# EAGLE board Warmie Helper Board V.9.2 (EAGLE 6.4)
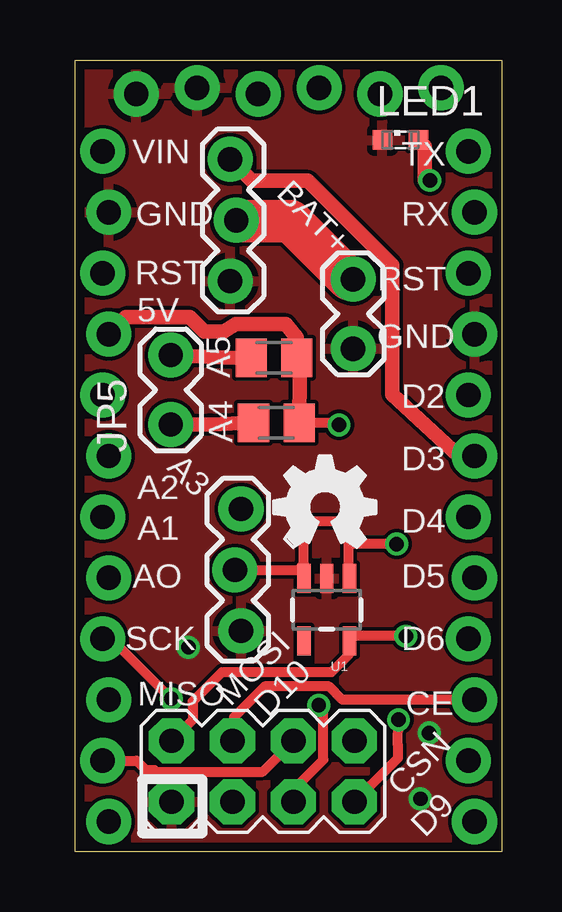
[diagram p0: board, top side]
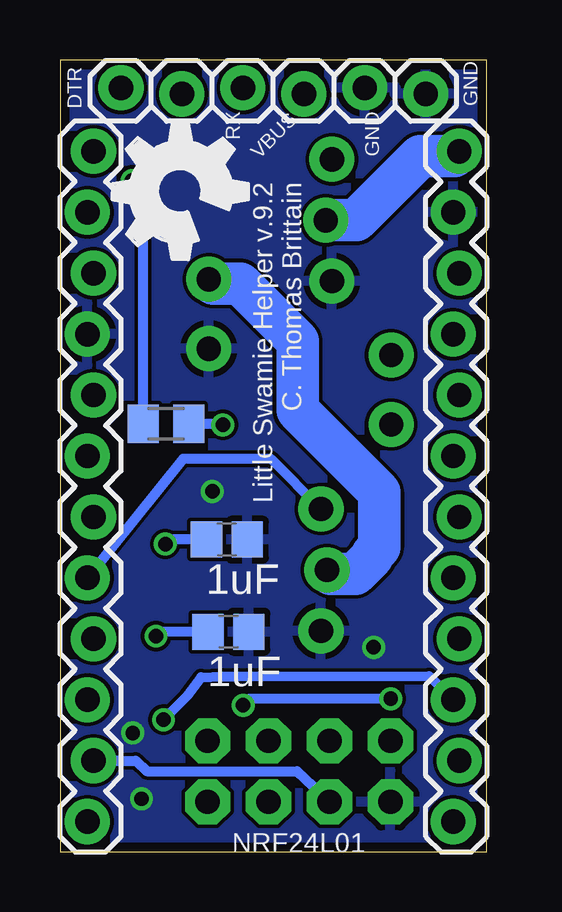
[diagram p1: board, bottom side, seen from below]

Size 17.78 x 33.02 mm. Coordinates in mm from the lower left corner, seen from the top.
Outline: 17.78,0 0,0 0,33.02 17.78,33.02 17.78,0
Copper layers (1*16): Top 0.0356mm / dielectric 1.25mm / Bottom 0.0356mm
Design rules "LaenPCBOrder *": minimum track width 6mil, minimum drill 13mil, track to track 6mil, track to pad 6mil, pad to pad 6mil, via to via 6mil, smd to smd 6mil, copper to edge 15mil, drill to drill 6mil, minimum pad ring 7mil, minimum via ring 7mil, stop-mask expansion 4mil, vias tented up to drill 0mil, thermal gap 10mil

## Footprints (pad centres in the part's own frame; a part is rotated, then mirrored left to right if it is on the bottom)
1X02_LOCK = drill 1.016 pad 1.88: 1 -0.178,0; 2 2.718,0
C0805 = smd 1.3 x 1.5: 1 -0.85,0; 2 0.85,0
1X12_LOCK = drill 1.016 pad 1.88: 1 0,0.127; 2 2.54,-0.127; 3 5.08,0.127; 4 7.62,-0.127; 5 10.16,0.127; 6 12.7,-0.127; 7 15.24,0.127; 8 17.78,-0.127; 9 20.32,0.127; 10 22.86,-0.127; 11 25.4,0.127; 12 27.94,-0.127
1X03_LOCK = drill 1.016 pad 1.88: 1 0,0.127; 2 2.54,-0.127; 3 5.08,0.127
1X06_LOCK = drill 1.016 pad 1.88: 1 0,0; 2 2.54,-0.254; 3 5.08,0; 4 7.62,-0.254; 5 10.16,0; 6 12.7,-0.254
SML0603 = smd 0.8 x 0.8: A 0.75,0; C -0.75,0
2X4 = drill 1.016 pad 1.88 octagon: 1 -3.81,-1.27; 2 -3.81,1.27; 3 -1.27,-1.27; 4 -1.27,1.27; 5 1.27,-1.27; 6 1.27,1.27; 7 3.81,-1.27; 8 3.81,1.27
M0805 = smd 1.3 x 1.6: 1 -0.95,0; 2 0.95,0
SOT23-5 = smd 0.55 x 1.2: 1 -0.95,-1.3; 2 0,-1.3; 3 0.95,-1.3; 4 0.95,1.3; 5 -0.95,1.3

## Placement (x,y rotation side)
BATTERY  [1X02_LOCK]  11.58,23.7 270 top
C1  1uF  [C0805]  10.76,9.18 0 bottom
C2  1uF  [C0805]  10.83,13.03 0 bottom
JP1  M12LOCK  [1X12_LOCK]  1.27,1.27 90 bottom
JP2  M12LOCK  [1X12_LOCK]  16.51,1.27 90 bottom
JP3  [1X03_LOCK]  6.58,23.8 90 top
JP4  [1X03_LOCK]  6.78,14.3 270 top
JP5  [1X02_LOCK]  3.98,18 90 top
JP6  [1X06_LOCK]  2.54,31.6 180 bottom
LED1  [SML0603]  13.55,29.69 0 top
NRF24L01  M04X2  [2X4]  7.82,3.36 180 top
R1  4.7k  [M0805]  8.38,17.9 180 top
R2  4.7k  [M0805]  8.28,20.6 180 top
R3  330  [M0805]  13.36,17.86 0 bottom
U1  V_REG_LDOSMD  [SOT23-5]  10.48,10.1 180 top
U$2  [OSHW_FILLX200_NOTEXT]  13.18,23.94 45 bottom
U$3  [OSHW_FILLX150_NOTEXT]  8.28,12.7 0 top

## Library data of the parts
BATTERY JP1-JP6 NRF24L01 U1 = SparkFun
C1 C2 R1-R3 = resistor
LED1 = led
U$2 U$3 = ohw-logo

## Nets
5V: JP1.9 R1.1 R2.1 R3.2
A1: JP1.6
A2: JP1.7
A3: JP1.8
A4: JP5.1 R1.2
A5: JP5.2 R2.2
AO: JP1.5
CE: JP2.2 NRF24L01.6
CSN: JP2.3 NRF24L01.5
D2: JP2.8
D3: JP2.7 JP3.3
D4: JP2.6
D5: JP2.5 JP4.1
D6: JP2.4
D9: JP2.1
DTR: JP6.6
GND: BATTERY.2 C1.2 C2.2 JP1.11 JP2.9 JP3.1 JP4.3 JP6.1 JP6.2 LED1.C NRF24L01.8 U1.2
IRQ: NRF24L01.1
MISO: JP1.3 NRF24L01.2
MOSI: JP1.2 NRF24L01.3
N$2: LED1.A R3.1
RST1: JP1.10
RST2: JP2.10
RX1: JP6.4
RX2: JP2.11
SCK: JP1.4 NRF24L01.4
TX1: JP6.5
TX2: JP2.12
V3.3: C1.1 NRF24L01.7 U1.5
VBUS: JP6.3
VIN: BATTERY.1 C2.1 JP1.12 JP3.2 JP4.2 U1.1 U1.3

## Tracks (layer width: path | path; a pad name or v marks a point on that pad's centre or on a via)
5V  (via drill 0.6)
  Top 0.406: R1.1 10.9,17.9 v10.99,17.81
  Top 0.61: R1.1 9.35,19.87 R2.1 9.23,21.45 8.78,22 6.68,22 6.18,21.7 5.38,21.7 4.78,22.3 2.11,22.3 JP1.9
  Bottom 0.406: R3.2 11.04,17.86 v10.99,17.81
A4
  Top 0.61: JP5.1 5.61,17.82 R1.2
A5
  Top 0.61: JP5.2 6.21,20.62 R2.2
CE
  Bottom 0.406: JP2.2 15.39,3.81 14.63,3.81 14.17,3.37 7.91,3.37 NRF24L01.6
CSN
  Top 0.406: JP2.3 11.13,6.35 10.58,6.9 7.89,6.9 6.61,5.62 6.61,4.69 NRF24L01.5
D3
  Top 0.61: JP2.7 15.97,16.51 13.21,19.07 13.21,24.46 9.69,27.98 7.35,27.98 JP3.3
D5
  Bottom 0.406: JP2.5 12.65,16.4 9,16.4 JP4.1
GND  (via drill 0.6)
  other vias: 14.75,4.96 14.38,2.22 4.72,8.53 11.43,15.04
  pour Top: -0.22,0 -0.22,33 17.78,33 17.78,0
  pour Bottom: -0.22,0 -0.22,33 17.78,33 17.78,0
MISO  (via drill 0.6)
  Top 0.406: v13.47,5.52 13.44,4.46 13.44,3.91 NRF24L01.2
  Bottom 0.406: JP1.3 2.4,7.34 10.52,7.32 11.05,7.32 11.9,7.29 12.48,6.5 v13.47,5.52
MOSI
  Top 0.406: JP1.2 2.56,3.81 2.95,3.42 3.3,3.42 3.38,3.35 7.81,3.35 NRF24L01.3
N$2  (via drill 0.6)
  Top 0.406: v14.78,28 14.56,28
  Top 0.61: 14.56,28 14.56,29.43 LED1.A
  Bottom 0.406: R3.1 14.31,27.53 v14.78,28
SCK  (via drill 0.6)
  Top 0.406: NRF24L01.4 9.09,2.6 10.34,3.85 10.34,5.92 v10.15,6.12 | JP1.4 1.5,8.89 v4,6.39
  Bottom 0.406: 10.13,6.1 v10.15,6.12 9.88,6.39 v4,6.39
V3.3  (via drill 0.6)
  Top 0.406: v13.78,9 11.63,9 U1.5 11.38,8.75 11.38,8.2 10.68,7.5 6.12,7.5 4.89,6.27 4.89,5.51 NRF24L01.7
  Bottom 0.406: C1.1 13.6,9.18 v13.78,9
VIN  (via drill 0.6)
  Top 0.406: U1.3 9.53,12 | 9.53,12 9.53,13.45 9.88,13.8 11.28,13.8 11.38,13.7 11.38,13 | 11.38,13 11.38,11.45 U1.1 | JP4.2 9.29,11.76 9.53,12 | v13.39,12.84 11.54,12.84 11.38,13
  Top 1.778: BATTERY.1 11.4,23.88 8.98,26.3 6.75,26.3 JP3.2
  Bottom 0.406: C2.1 13.2,13.03 v13.39,12.84
  Bottom 1.778: JP4.2 6.49,11.6 5.48,11.6 4.78,12.3 4.78,12.4 4.48,12.7 4.48,15 7.88,18.4 7.88,21.3 10.28,23.7 11.4,23.7 BATTERY.1 | JP3.2 5.44,26.34 2.78,29 1.35,29 JP1.12

## Text on the board
_tsilk: VIN | TX | GND | BAT+ | RX | RST | RST | 5V | GND | A5 | D2 | A4 | D3 | A2 | A3 | A1 | D4 | AO | D5 | SCK | D6 | MISO | MOSI | D10 | CE | CSN | D9
_bsilk: GND | DTR | RX | TX | GND | VBUS | Little Swamie Helper v.9.2 / C. Thomas Brittain | NRF24L01